# EAGLE board trinketm0fader_35mm (EAGLE 9.4.2)
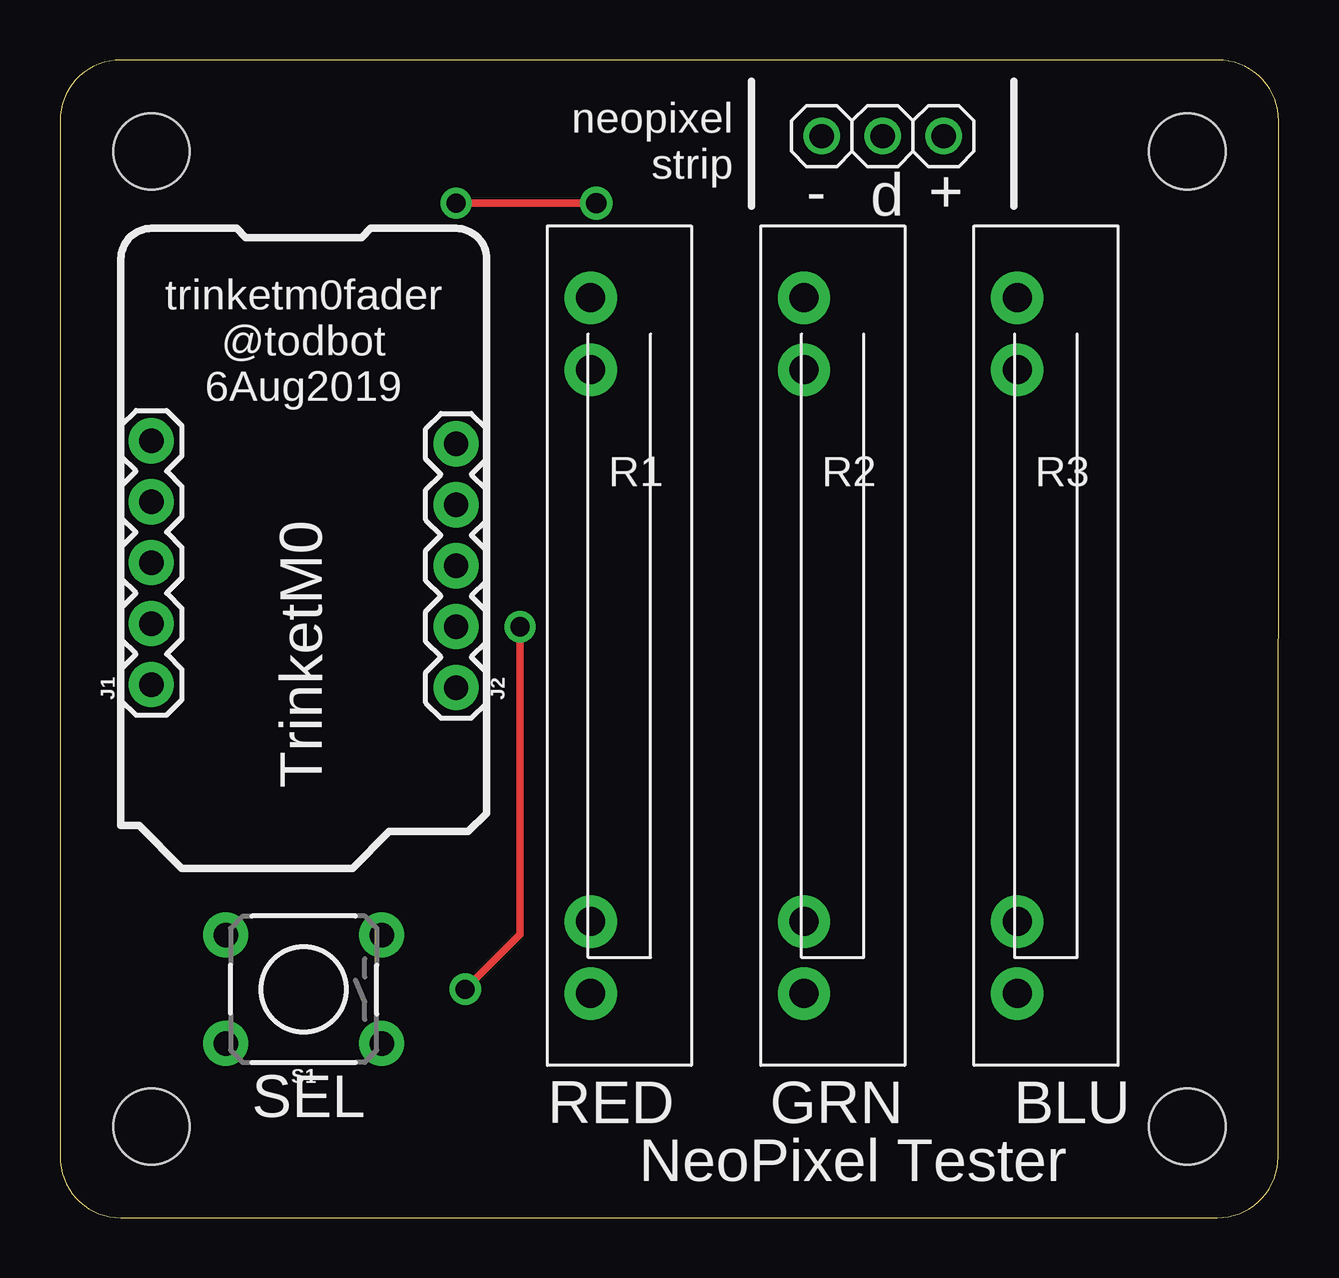
[diagram p0: board, top side]
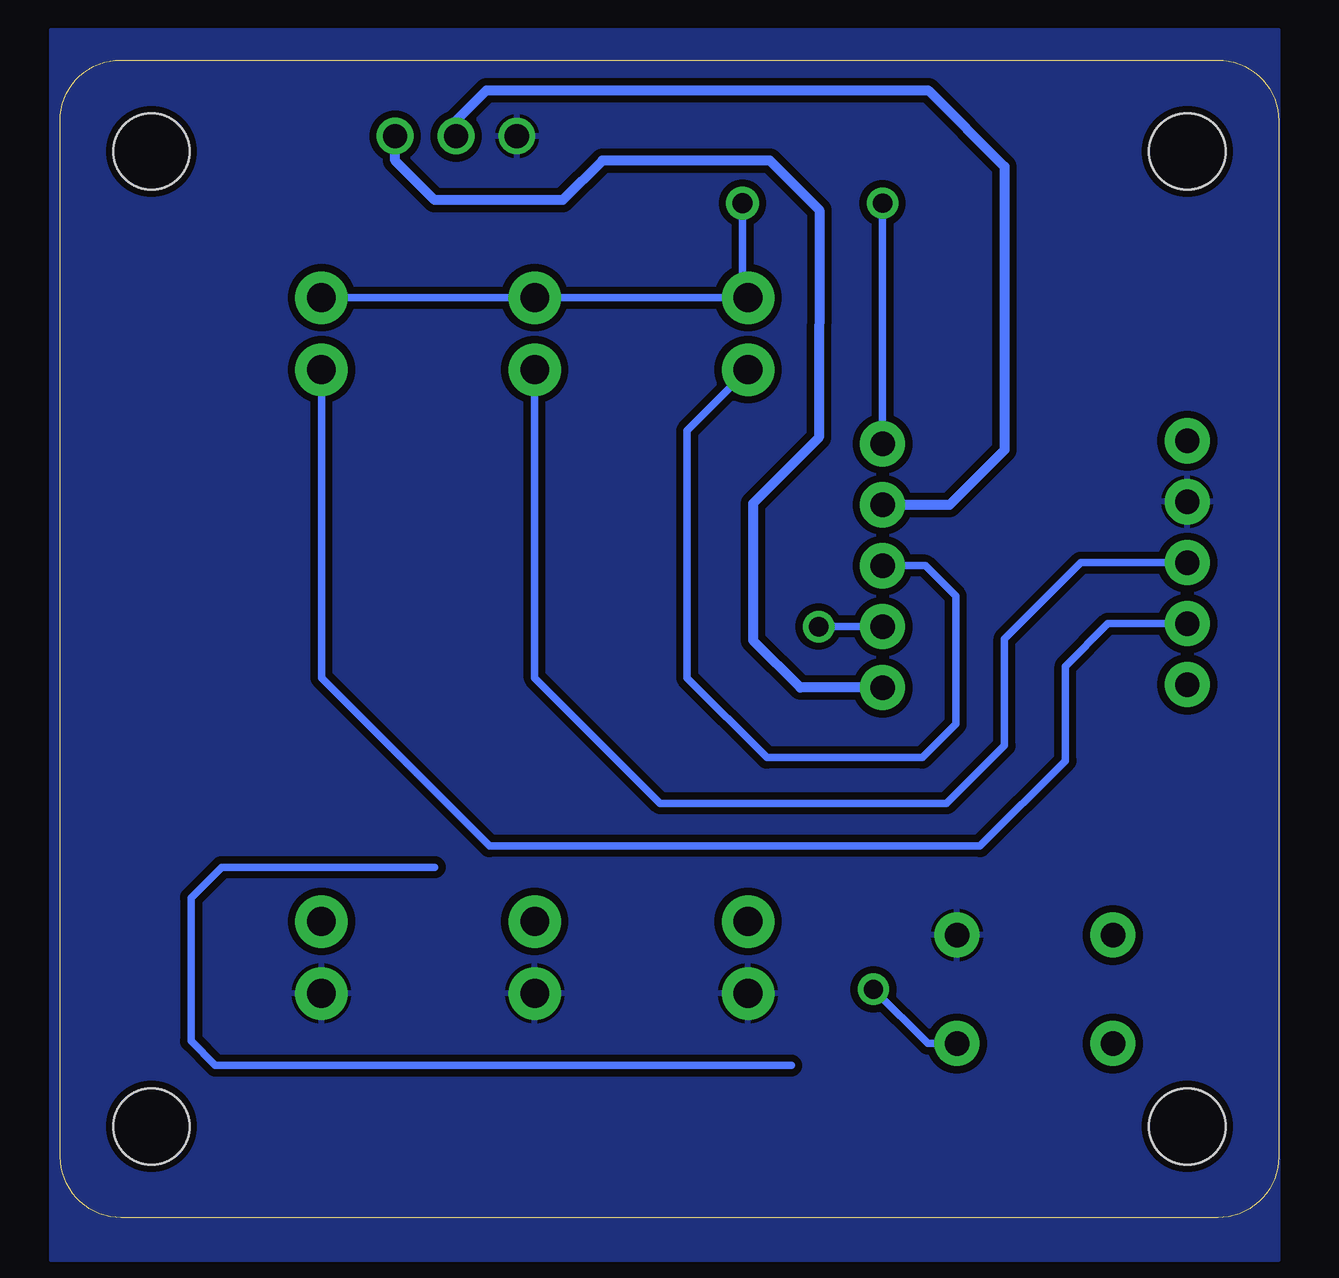
[diagram p1: board, bottom side, seen from below]

Size 50.8 x 48.26 mm. Coordinates in mm from the lower left corner, seen from the top.
Outline: 0,45.72 0,2.54 arc90 2.54,0 48.24,0 arc90 50.78,2.54 50.8,45.72 arc90 48.26,48.26 2.54,48.26 arc90 0,45.72
Copper layers (1*16): Top 0.035mm / dielectric 1.5mm / Bottom 0.035mm
Design rules "OthermillDRC_30_deg_v2": minimum track width 6mil, minimum drill 0.8mm, track to track 6mil, track to pad 6mil, pad to pad 6mil, via to via 6mil, smd to smd 0mil, copper to edge 0mil, drill to drill 6mil, minimum pad ring 10mil, minimum via ring 10mil, stop-mask expansion 1mil, vias tented up to drill 30mil, thermal gap 6mil
Holes 3.17 mm at 3.81,3.81 46.99,3.81 3.81,44.45 46.99,44.45

## Footprints (pad centres in the part's own frame; a part is rotated, then mirrored left to right if it is on the bottom)
1X05 = drill 1.016 pad 1.88: 1 0,0; 2 2.54,0; 3 5.08,0; 4 7.62,0; 5 10.16,0
1X03 = drill 1.016: 1 -2.54,0; 2 0,0; 3 2.54,0
SLIDEPOT_35MM_GUITAR = drill 1.2 pad 2.184: P$1 1.8,32; P$2 1.8,29; P$3 1.8,6; P$4 1.8,3
TACTILE_SWITCH_PTH_6.0MM = drill 1.016 pad 1.88: 1 -3.251,2.261; 2 3.251,2.261; 3 -3.251,-2.261; 4 3.251,-2.261

## Placement (x,y rotation side)
J1  [1X05]  3.81,22.23 90 top
J2  [1X05]  16.51,22.1 90 top
JP1  [1X03]  34.29,45.09 0 top
R1  SLIDER_POT  [SLIDEPOT_35MM_GUITAR]  20.32,6.35 0 top
R2  SLIDER_POT  [SLIDEPOT_35MM_GUITAR]  29.21,6.35 0 top
R3  SLIDER_POT  [SLIDEPOT_35MM_GUITAR]  38.1,6.35 0 top
S1  MOMENTARY-SWITCH-SPST-PTH-6.0MM  [TACTILE_SWITCH_PTH_6.0MM]  10.16,9.53 180 top

## Library data of the parts
J1 J2 = SparkFun-Connectors
JP1 = adafruit
R1-R3 = todstuff
S1 = SparkFun-Switches; PROD_ID: SWCH-08441; SF_SKU: COM-00097

## Nets
0: J2.2 S1.1
1: J2.3 R1.P$2
2: J2.4 JP1.2
3: J1.2 R3.P$2
4: J1.3 R2.P$2
+3V3: J2.5 R1.P$1 R2.P$1 R3.P$1
+5V: J2.1 JP1.3
BAT: J1.5
GND: J1.4 JP1.1 R1.P$4 R2.P$4 R3.P$4 S1.3
RST: J1.1

## Tracks (layer width: path | path; a pad name or v marks a point on that pad's centre or on a via)
0  (via drill 0.8)
  Top 0.305: v16.89,9.53 19.18,11.81 v19.18,24.64
  Bottom 0.305: J2.2 v19.18,24.64 | v16.89,9.53 14.63,7.26 S1.1
1
  Bottom 0.305: J2.3 14.73,27.18 13.46,25.91 13.46,20.57 14.86,19.18 21.34,19.18 24.66,22.5 24.66,32.81 R1.P$2
2
  Bottom 0.406: JP1.2 34.29,45.72 33.02,46.99 14.61,46.99 11.43,43.81 11.43,32 13.72,29.72 J2.4
3
  Bottom 0.305: J1.2 7.11,24.77 8.89,22.99 8.89,19.05 12.45,15.49 32.89,15.49 39.9,22.5 R3.P$2
4
  Bottom 0.305: J1.3 8.25,27.3 11.43,24.13 11.43,19.68 13.84,17.27 25.78,17.27 31.01,22.5 R2.P$2
+3V3  (via drill 0.8, 0.85)
  Top 0.305: v22.35,42.29 v16.51,42.29
  Bottom 0.305: v16.51,42.29 J2.5 | R3.P$1 R2.P$1 R1.P$1 22.35,38.38 v22.35,42.29
+5V
  Bottom 0.406: J2.1 19.94,22.1 21.91,24.07 21.91,29.78 19.17,32.52 19.14,42 21.21,44.07 28.19,44.07 29.84,42.42 35.18,42.42 36.83,44.07 JP1.3
GND
  pour Bottom (isolate 0.305): 0,49.53 51.18,49.53 51.18,-1.78 0,-1.78
N$1
  Bottom 0.305: 35.18,14.61 44.07,14.61 45.34,13.34 45.34,7.37 44.32,6.35 20.32,6.35

## Text on the board
tPlace: neopixel / strip | - | d | + | trinketm0fader / @todbot / 6Aug2019 | TrinketM0 | SEL | RED | GRN | BLU | NeoPixel Tester
Measures: trinketm0fader / @todbot / 6Aug2019